# Altium PCB MGMEZZ02.PCBDOC (part 3 of 5)
Units mil, origin at the board's own origin, x right, y up, seen from the top; angles counter-clockwise.
Board outline 5705.83 x 3625.73 mil, 6 copper layers (Top Layer, Internal Plane 1, Mid-Layer 1, Mid-Layer 2, Internal Plane 2, Bottom Layer); 570 components, 354 nets, 2192 pads, 728 vias.
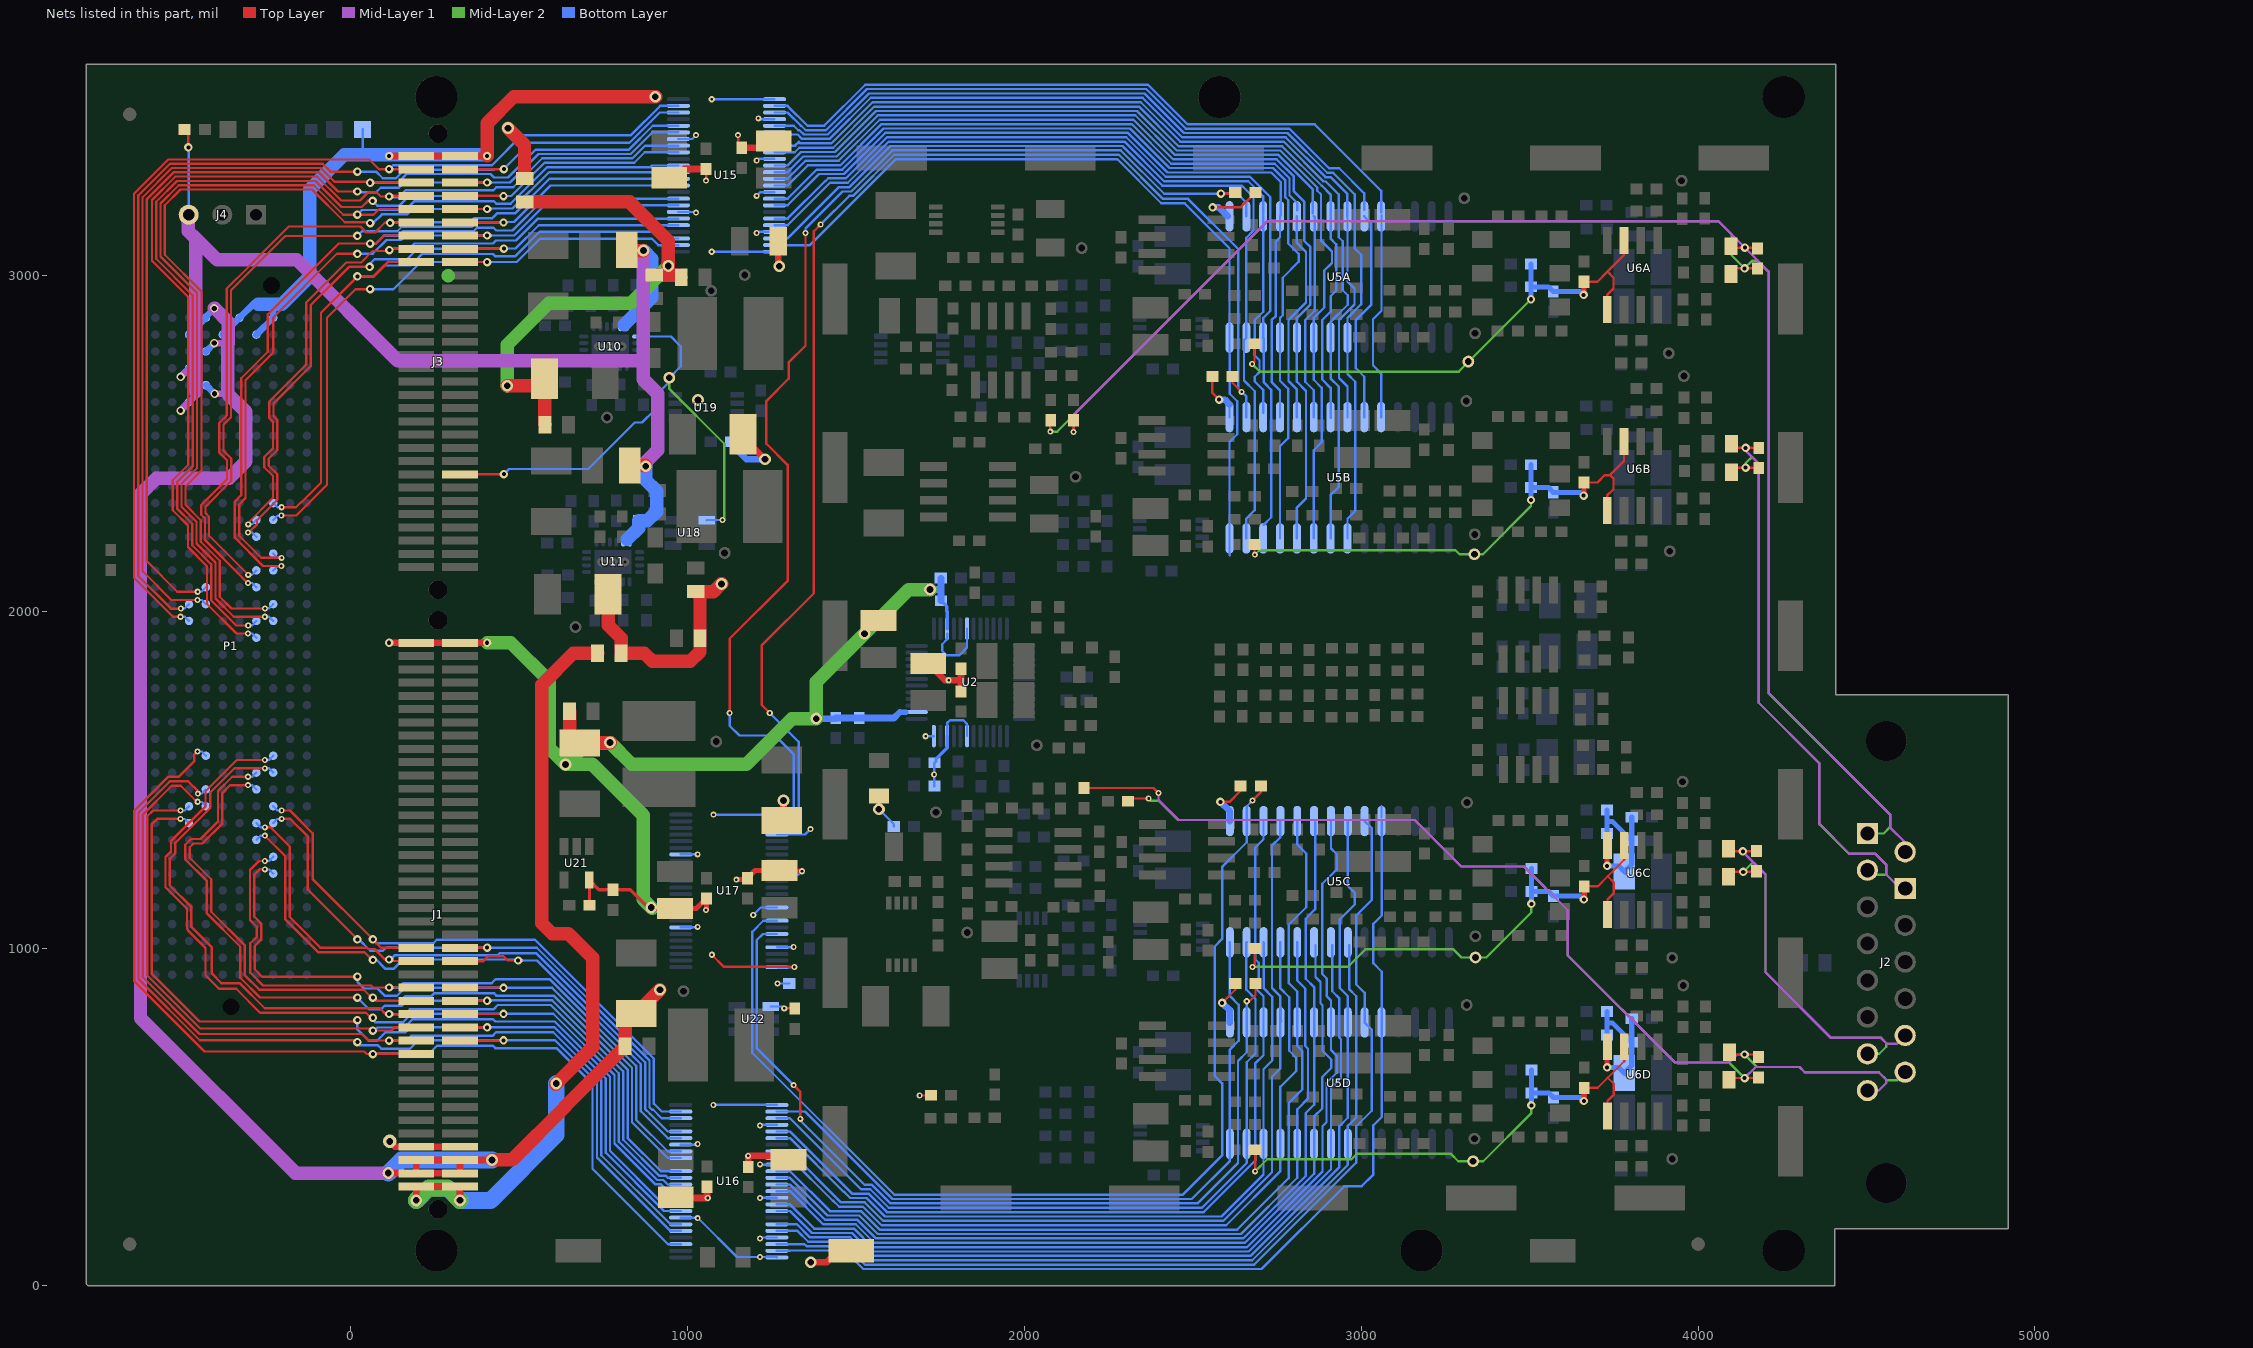
[diagram p7: the nets of this part, all layers, seen from the top]

## Via types
v1: diameter 25, hole 12, Top Layer to Bottom Layer, 292 vias
v2: diameter 18, hole 8, Top Layer to Bottom Layer, 225 vias
v3: diameter 25, hole 15, Top Layer to Bottom Layer, tented both sides, 91 vias
v4: diameter 18, hole 8, Top Layer to Bottom Layer, tented both sides, 61 vias
v5: diameter 35, hole 20, Top Layer to Bottom Layer, 58 vias
v6: diameter 40, hole 20, Top Layer to Bottom Layer, 1 vias

## Nets (pads, with @x,y where several pads share a name; then routed paths per layer and width w, separated by ;. In a path a pad name is that pad's centre, name@x,y a point inside that pad or via, vN(x,y) a via of type N, cw(c..) or ccw(c..) an arc to the next point about the centre after c; other vN are vias at no path point) (continued)
AMPBOTSUPC: C67C.2 C69C.1 C70C.1 R49C.1 R50C.1 U6C.4 | length 461.6
  Top Layer w15: v1(3730,1246) 3730,1306 U6C.4@3731,1307
  Bottom Layer w15: R50C.1@3729,1412 3730,1411 3730,1378 ; v1(3730,1246) 3763.88,1246 C67C.2@3780.88,1229 ; R49C.1@3730,1342 3730,1378 ; C67C.2@3784,1225.88 C67C.2@3780.88,1229 ; C70C.1@3803,1390.4 C69C.1@3803,1320.4 ; 3730,1378 3745.4,1378 C69C.1@3803,1320.4 ; C67C.2@3780.88,1229 3803,1251.12 C69C.1@3803,1320.4
AMPBOTSUPD: C67D.2 C69D.1 C70D.1 R49D.1 R50D.1 U6D.4 | length 461.6
  Top Layer w15: v1(3730,648) 3730,708 U6D.4@3731,709
  Bottom Layer w15: R50D.1@3729,814 3730,813 3730,780 ; v1(3730,648) 3763.88,648 C67D.2@3780.88,631 ; R49D.1@3730,744 3730,780 ; C67D.2@3784,627.88 C67D.2@3780.88,631 ; C70D.1@3803,792.4 C69D.1@3803,722.4 ; 3730,780 3745.4,780 C69D.1@3803,722.4 ; C67D.2@3780.88,631 3803,653.12 C69D.1@3803,722.4
BUCKSYNC: BuckSync.1 J3.50 U10.17 U18.4 | length 1557.6
  Top Layer w7: J3.50@324.55,2408.63 453.33,2408.63 453.63,2408.93 v1(454.63,2408.93)
  Mid-Layer 2 w7: BuckSync.1@946,2695 946,2662 1109,2499 v2@1109,2272.57
  Bottom Layer w7: v1(454.63,2408.93) 469.7,2424 705,2424 843,2562 865,2562 899.98,2596.98 899.98,2636.98 946,2683 BuckSync.1@946,2695 980,2729 980,2788 950.72,2817.28 U10.17@849.24,2817.28 ; U18.4@1057.14,2271.97 1057.74,2272.57 v2(1104,2272.57)
CMODEA: C75A.2 CModeA.1 R20A.1 R25A.2 R57A.2 R84A.2 U6A.3 U6A.5 | length 1620.9
  Top Layer w7: v2(2676,2736) 2683,2743 R57A.2@2683,2796 ; R84A.2@3661,2980 3701,2980 3731,3010 ; U6A.5@3730,2897 3730,2941 3749,2960 3749,2992 3731,3010 ; U6A.3@3780,3102 3780,3059 3731,3010
  Top Layer w15: v1(3660,2941) 3661,2942 R84A.2@3661,2980
  Mid-Layer 2 w7: v2(2676,2736) 2699,2713 3289,2713 v1(3504,2928)
  Bottom Layer w15: v1(3504,2928) C75A.2@3504,2965 3556,2965 R20A.1@3570,2951 3650,2951 v1(3660,2941) ; C75A.2@3504,2967 R25A.2@3504,3033
CMODEB: C75B.2 CModeB.1 R20B.1 R25B.2 R57B.2 R84B.2 U6B.3 U6B.5 | length 1566.6
  Top Layer w7: R57B.2@2683,2200 2683,2171 v2(2684,2170) ; R84B.2@3661,2384 3701,2384 3723,2406 3738,2406 3780,2448 U6B.3@3780,2506 ; U6B.5@3730,2301 3730,2345 3749,2364 3749,2396 3738.5,2406.5
  Top Layer w15: v1(3660,2345) 3661,2346 R84B.2@3661,2384
  Mid-Layer 2 w7: v2(2684,2170) 2697,2183 3280,2183 3292,2171 CModeB.1@3336,2171 3361,2171 3504,2314 v1@3504,2331
  Bottom Layer w15: v1(3504,2332) C75B.2@3504,2369 3556,2369 R20B.1@3570,2355 3650,2355 v1(3660,2345) ; C75B.2@3504,2371 R25B.2@3504,2437
CMODEC: C75C.2 CModeC.1 R20C.1 R25C.2 R57C.2 R84C.2 U6C.3 U6C.5 | length 1623.3
  Top Layer w7: v2(2677,946) 2684,953 R57C.2@2684,1001 ; R84C.2@3662,1185 3702,1185 3732,1215 ; U6C.5@3731,1102 3731,1146 3750,1165 3750,1197 3732,1215 ; U6C.3@3781,1307 3781,1264 3732,1215
  Top Layer w15: v1(3661,1146) 3662,1147 R84C.2@3662,1185
  Mid-Layer 2 w7: v2@2683,946 2960.1,946 3012.1,998 3274,998 3298,974 CModeC.1@3339,974 3371,974 3505,1108 v1(3505,1133)
  Bottom Layer w15: v1(3505,1133) C75C.2@3505,1170 3557,1170 R20C.1@3571,1156 3651,1156 v1(3661,1146) ; C75C.2@3505,1172 R25C.2@3505,1238
CMODED: C75D.2 CModeD.1 R20D.1 R25D.2 R57D.2 R84D.2 U6D.3 U6D.5 | length 1628.7
  Top Layer w7: R57D.2@2684,403 2685,402 v2(2685,339) ; R84D.2@3662,587 3702,587 3732,617 ; U6D.5@3731,504 3731,548 3750,567 3750,599 3732,617 ; U6D.3@3781,709 3781,666 3732,617
  Top Layer w15: v1(3661,548) 3662,549 R84D.2@3662,587
  Mid-Layer 2 w7: v2(2685,339) 2721,375 2970.81,375 2986.81,391 3266,391 3288,369 CModeD.1@3332,369 3362,369 3505,512 v1(3505,535)
  Bottom Layer w15: v1(3505,535) C75D.2@3505,572 3557,572 R20D.1@3571,558 3651,558 v1(3661,548) ; C75D.2@3505,574 R25D.2@3505,640
DACA_N: C112A.2 J2.9 L19A.2 R93AF.1 | length 4413.7
  Top Layer w7: v2(2146,2534) R93AF.1@2146,2569 ; L19A.2@4096,3088 L19A.2@4098,3086 ; L19A.2@4103,3081 v1(4139,3081) C112A.2@4174,3081
  Mid-Layer 1 w7: v2(2146,2534) 2146,2584 2722,3160 4060,3160 v1(4139,3081) 4210,3010 4210,1758.59 4570,1398.59 4570,1360 4614.75,1315.25 J2.9@4614.75,1287.53
DACA_P: C112A.1 J2.1 L18A.2 R22AF.1 | length 4476.5
  Top Layer w7: v2(2077,2535) 2077,2568 R22AF.1@2078,2569 ; L18A.2@4114,3020 v1(4138,3020) C112A.1@4175,3020
  Mid-Layer 2 w7: v2(2077,2535) 2097.43,2535 2722.43,3160 4060,3160 4100,3120 4100,3058 v1(4138,3020) 4160,3042 4176.78,3042 4209.39,3009.39 4209.39,1759.06 4570,1398.45 4570,1360.94 4551.09,1342.03 J2.1@4502.75,1342.03
DACB_N: C112B.2 J2.10 L19B.2 | length 1644
  Top Layer w7: L19B.2@4099,2499 4111,2487 v1(4141,2487) C112B.2@4180,2487
  Mid-Layer 1 w7: v1(4141,2487) 4141,2479 4180,2440 4180,1730 4360,1550 4360,1370.78 4448.78,1282 4525.22,1282 4558.75,1248.47 4558.75,1220 4600.22,1178.53 J2.10@4614.75,1178.53
DACB_P: C112B.1 J2.2 L18B.2 | length 1639.4
  Top Layer w7: L18B.2@4099,2414 4113,2428 v1(4141,2428) 4179,2428 C112B.1@4180,2427
  Mid-Layer 2 w7: v1(4141,2428) 4141,2441 4159.81,2459.81 4179.61,2440 4179.61,1733.8 4180,1733.41 4180,1730 4359.59,1550.41 4359.59,1377.04 4360,1376.63 4360,1370 4448,1282 4526.75,1282 4558.75,1250 4558.75,1220 4515.78,1220 J2.2@4502.75,1233.03
DACC_N: C112C.2 J2.14 L19C.2 | length 986.4
  Top Layer w7: L19C.2@4090,1297 4098,1289 v1(4133,1289) 4172,1289 C112C.2@4173,1290
  Mid-Layer 1 w7: v1(4133,1289) 4133,1287 4200,1220 4200,930 4394.78,735.22 4542.56,735.22 4560,717.78 4590,717.78 J2.14@4614.75,742.53
DACC_P: C112C.1 J2.7 L18C.2 | length 972
  Top Layer w7: L18C.2@4104,1228 v1(4134,1228) 4171,1228 C112C.1@4173,1230
  Mid-Layer 2 w7: v1(4134,1228) 4159,1253 4167.94,1253 4200,1220.94 4200,930 4394.78,735.22 4543.53,735.22 4558.75,720 4558.75,708.75 4538.03,688.03 J2.7@4502.75,688.03
DACD_N: C112D.2 J2.15 L19D.2 R93DF.1 | length 3010.3
  Top Layer w7: R93DF.1@2177,1477 2383,1477 v2(2398,1462) ; L19D.2@4093,693 4100,686 v1(4138,686) 4171,686 C112D.2@4179,678 C112D.2@4179.61,678.61
  Mid-Layer 1 w7: v2(2398,1462) 2398,1441.04 2457.02,1382.02 3158.98,1382.02 3297,1244 3483,1244 3613,1114 3613,980 3930.98,662.02 4092.02,662.02 4116,686 v1(4138,686)
  Mid-Layer 2 w7: v1(4138,686) 4175,649 4301,649 4316.47,633.53 4536.47,633.53 4560,610 4591.22,610 J2.15@4614.75,633.53
DACD_P: C112D.1 J2.8 L18D.2 R22DF.1 | length 2870.6
  Top Layer w7: R22DF.1@2308,1438 2316,1446 v2(2369,1446) ; L18D.2@4092,611 4097,616 v1(4138,616) 4177,616 C112D.1@4179,618
  Mid-Layer 1 w7: v1(4138,616) 4171,649 4301,649 4316.47,633.53 4536.47,633.53 4558.75,611.25 4558.75,601.53 4536.25,579.03 J2.8@4502.75,579.03
  Mid-Layer 2 w7: v2(2369,1446) 2375.5,1439.5 2398.5,1439.5 2456,1382 3159,1382 3297,1244 3483,1244 3613,1114 3613,980 3931,662 4092,662 v1(4138,616)
DACDATAAB0: U5A.7 U5B.7 U15.5 | length 2976.6
  Bottom Layer w7: U15.5@1258.17,3443.07 1315.47,3443.07 1328.54,3430 1332.39,3430 1345.39,3417 1416.23,3417 1538.23,3539 2356.23,3539 2473.73,3421.5 2781.11,3421.5 2898.87,3303.75 2916.54,3303.75 2980.86,3239.42 2980.86,3187.29 ; U5B.7@2959,2217.88 2959,2276.62 2982,2299.62 2982,2683 2959,2706 U5A.7@2959,2813.88 2959,2872.62 3000,2913.62 3000,3060 2980.31,3079.69 2980.31,3190
DACDATAAB1: U5A.8 U5B.8 U15.8 | length 2915.6
  Bottom Layer w7: U15.8@1258.17,3384.01 1319.32,3384.01 1330.46,3395.16 1334.62,3391 1427,3391 1549,3513 2345.46,3513 2462.96,3395.5 2770.35,3395.5 2888.1,3277.75 2894.74,3277.75 2933.07,3239.42 2933.07,3190.55 ; U5B.8@2909,2217.88 2909,2347 2933,2371 2933,2669 2909,2693 U5A.8@2909,2813.88 2909,2860.89 2960,2911.89 2960,2940 2945,2955 2945,3100 2933,3112 2933,3187.31
DACDATAAB2: U5A.9 U5B.9 U15.11 | length 2874.1
  Bottom Layer w7: U15.11@1258.17,3324.96 1297.03,3324.96 1337.08,3365 1437.77,3365 1559.77,3487 2334.69,3487 2452.19,3369.5 2759.58,3369.5 2869.49,3259.59 2869.49,3250.32 2880.31,3239.5 2880.31,3190.55 ; U5B.9@2859,2217.88 2859,2480 2883,2504 2883,2665 2859,2689 U5A.9@2859,2813.88 2859,2872.62 2890,2903.62 2890,3013 2913,3036 2913,3070 2880.31,3102.69 2880.31,3190
DACDATAAB3: U5A.10 U5B.10 U15.13 | length 2818
  Bottom Layer w7: U15.13@1258.17,3285.59 1297.03,3285.59 1350.45,3339 1448.54,3339 1570.54,3461 2323.92,3461 2441.42,3343.5 2748.81,3343.5 2799.91,3292.4 2799.91,3248.22 2830.31,3217.81 2830.31,3101.46 2849,3082.77 2849,2912.62 2809,2872.62 U5A.10@2809,2813.88 2809,2683 2836,2656 2836,2337 2809,2310 U5B.10@2809,2217.88
DACDATAAB4: U5A.11 U5B.11 U15.16 | length 2788.9
  Bottom Layer w7: U15.16@1258.17,3226.53 1297.03,3226.53 1383.5,3313 1459.31,3313 1581.31,3435 2313.15,3435 2430.65,3317.5 2738.04,3317.5 2773.91,3281.63 2773.91,3231.31 2783.18,3222.05 2783.18,3093.82 2814.11,3062.89 2814.11,3039.11 2767,2992 2767,2880.62 2759,2872.62 U5A.11@2759,2813.88 2759,2686.18 2783.18,2662 2783.18,2515.82 2759,2491.65 U5B.11@2759,2217.88
DACDATAAB5: U5A.12 U5B.12 U15.19 | length 2647.2
  Bottom Layer w7: U15.19@1258.17,3167.48 1297.03,3167.48 1407.98,3278.42 1409.28,3278.42 1417.86,3287 1470.08,3287 1592.08,3409 2302.38,3409 2419.88,3291.5 2669.73,3291.5 2730.31,3230.92 2730.31,2893.93 2709,2872.62 U5A.12@2709,2813.88 2711,2811.88 2711,2681 2733,2659 2733,2281 U5B.12@2710,2258
DACDATAAB6: U5A.13 U5B.13 U15.22 | length 2647.1
  Bottom Layer w7: U15.22@1258.17,3108.42 1297.03,3108.42 1449.61,3261 1480.85,3261 1602.85,3383 2291.61,3383 2409.11,3265.5 2645.5,3265.5 2680.31,3230.69 2680.31,3190 2680.31,3131.83 2659,3110.52 U5A.13@2659,2813.88 2652,2806.88 2652,2687 2684,2655 2684,2302 2659,2277 U5B.13@2659,2217.88
DACDATAAB7: U5A.14 U5B.14 U15.23 | length 2497.1
  Bottom Layer w7: U15.23@1258.17,3088.74 1363.74,3088.74 1619,3344 2275.46,3344 2406.46,3213 2475.62,3213 2609,3079.62 U5A.14@2609,2813.88 2609,2764.25 2609.39,2763.86 2609.39,2647.61 2632,2625 2632,2527 2609,2504 U5B.14@2609,2217.88 2609,2168.25 2609.39,2167.86
DACDATAAB8: U5A.17 U5B.17 U15.20 | length 2289.2
  Bottom Layer w7: U15.20@1258.17,3147.79 1297.03,3147.79 1423.24,3274 1475.46,3274 1597.46,3396 2297,3396 2414.5,3278.5 2664.35,3278.5 2708.77,3234.07 U5A.17@2708.77,3180.23 ; U5B.17@2708.97,2591.51 2708.97,2659.03 2684,2684 2684,2698 2698,2712 2698,2747 2684,2761 2684,2866 2709,2891 U5A.17@2709,3174.12
DACDATAAB9: U5A.18 U5B.18 U15.17 | length 2369
  Bottom Layer w7: U15.17@1258.17,3206.85 1297.03,3206.85 1390.19,3300 1464.69,3300 1586.69,3422 2307.77,3422 2425.27,3304.5 2732.65,3304.5 2760.91,3276.24 2760.91,3176.97 U5A.18@2761.45,3177.51 ; U5B.18@2759,2578.12 2759,2657 2734,2682 2734,2866 2746.5,2878.5 2746.5,3099.5 2759,3112 U5A.18@2759,3174.12
DACDATAAB10: U5A.19 U5B.19 U15.14 | length 2414.8
  Bottom Layer w7: U15.14@1258.17,3265.9 1297.03,3265.9 1357.13,3326 1453.92,3326 1575.92,3448 2318.54,3448 2436.04,3330.5 2743.42,3330.5 2786.91,3287.01 2786.91,3236.7 2809.79,3213.82 U5A.19@2809.79,3191.63 ; U5B.19@2809,2578.12 2809,2660.28 2784,2685.28 2784,2866 2836,2918 2836,3068.01 2809,3095.01 U5A.19@2809,3174.12
DACDATAAB11: U5A.20 U5B.20 U15.12 | length 2450.3
  Bottom Layer w7: U15.12@1258.17,3305.27 1297.03,3305.27 1343.76,3352 1443.15,3352 1565.15,3474 2329.31,3474 2446.81,3356.5 2754.19,3356.5 2856.49,3254.2 U5A.20@2856.49,3182.4 ; U5B.20@2859,2578.12 2859,2658 2834,2683 2834,2866 2862,2894 2862,3171.12 U5A.20@2859,3174.12
DACDATAAB12: U5A.21 U5B.21 U15.9 | length 2515.1
  Bottom Layer w7: U15.9@1258.17,3364.33 1318.02,3364.33 1331.69,3378 1432.38,3378 1554.38,3500 2340.08,3500 2457.58,3382.5 2764.96,3382.5 2882.72,3264.75 2883.31,3264.75 2909.17,3238.88 U5A.21@2909.17,3172.08 ; U5A.21@2909,3174.12 2909,3108 2926,3091 2926,2954 2909,2937 2909,2891 2884,2866 2884,2690 2909.17,2664.83 U5B.21@2909.17,2576.08
DACDATAAB13: U5A.22 U5B.22 U15.6 | length 2578.8
  Bottom Layer w7: U15.6@1258.17,3423.38 1297.03,3423.38 1303.42,3417 1327,3417 1340,3404 1421.61,3404 1543.61,3526 2350.85,3526 2468.35,3408.5 2775.73,3408.5 2893.49,3290.75 2908.9,3290.75 2958.05,3241.6 U5A.22@2958.05,3173.17 ; U5B.22@2959,2578.12 2959,2669 2934,2694 2934,2866 2980,2912 2980,2960 2959,2981 U5A.22@2959,3174.12
DACDATAAB14: U5A.23 U5B.23 U15.3 | length 2633.7
  Bottom Layer w7: U15.3@1258.17,3482.44 1297.03,3482.44 1336.47,3443 1337.77,3443 1350.77,3430 1410.84,3430 1532.84,3552 2361.62,3552 2479.11,3434.5 2786.5,3434.5 2904.25,3316.75 2934.49,3316.75 3008.55,3242.68 U5A.23@3008.55,3193.81 ; U5B.23@3009,2578.12 3009,2698 2984,2723 2984,2866 3030,2912 3030,3153.12 U5A.23@3009,3174.12
DACDATAAB15: U5A.24 U5B.24 U15.2 | length 2721.9
  Bottom Layer w7: U15.2@1258.17,3502.12 1297.03,3502.12 1356.16,3443 1405.46,3443 1527.46,3565 2367,3565 2484.5,3447.5 2861.5,3447.5 3059.06,3249.94 U5A.24@3059.06,3185.66 ; U5B.24@3059,2578.12 3059,2708 3035,2732 3035,2868.88 3060,2893.88 U5A.24@3060,3177 ; U5B.24@3059.06,2589.66 U5B.24@3059.06,2621.7
DACDATACD0: U5C.7 U5D.7 U16.20 | length 2518.9
  Bottom Layer w7: U16.20@1265.18,162.25 1326.32,162.25 1358.57,130 1477.61,130 1532.61,75 2676.62,75 2960,358.38 U5D.7@2960,420.88 2960,474 2985,499 2985,859 2964,880 U5C.7@2964,1009.88
DACDATACD1: U5C.8 U5D.8 U16.17 | length 2483.7
  Bottom Layer w7: U16.17@1265.18,221.3 1304.03,221.3 1369.33,156 1488.38,156 1543.38,101 2665.85,101 2910,345.15 U5D.8@2910,420.88 2910,586 2940,616 2940,731.31 2935,736.31 2935,852.63 2914,873.63 U5C.8@2914,1009.88
DACDATACD2: U5C.9 U5D.9 U16.14 | length 2461.8
  Bottom Layer w7: U16.14@1265.18,280.36 1304.03,280.36 1402.39,182 1499.15,182 1554.15,127 2655.08,127 2860,331.92 U5D.9@2860,420.88 2860,502 2884,526 2884,619 2911,646 2911,671 2885,697 2885,832.2 2879,838.2 2879,901.38 2864,916.38 U5C.9@2864,1009.88
DACDATACD3: U5C.10 U5D.10 U16.12 | length 2408.4
  Bottom Layer w7: U16.12@1265.18,319.73 1304.03,319.73 1415.76,208 1509.92,208 1564.92,153 2643,153 2810,320 U5D.10@2810,420.88 2810,523 2842,555 2842,703.23 2834,711.23 2834,882 2810,906 U5C.10@2810,1018.88
DACDATACD4: U5C.11 U5D.11 U16.9 | length 2362.1
  Bottom Layer w7: U16.9@1265.18,378.78 1304.03,378.78 1430.82,252 1432.12,252 1450.12,234 1520.69,234 1575.69,179 2599,179 2760,340 U5D.11@2760,420.88 2760,590 2807,637 2807,675.88 2786,696.88 2786,855.91 2760,881.91 U5C.11@2760,1018.88
DACDATACD5: U5C.12 U5D.12 U16.6 | length 2303.5
  Bottom Layer w7: U16.6@1265.18,437.84 1304.03,437.84 1463.87,278 1465.17,278 1483.17,260 1531.46,260 1586.46,205 2585,205 2710,330 U5D.12@2710,420.88 2710,642 2736,668 2736,857 2711,882 2711,1017.88 U5C.12@2710,1018.88
DACDATACD6: U5C.13 U5D.13 U16.3 | length 2237.9
  Bottom Layer w7: U16.3@1265.18,496.89 1304.03,496.89 1514.93,286 1542.23,286 1597.23,231 2527.31,231 2660,363.69 U5D.13@2660,420.88 2660,663 2686,689 2686,851 2658.5,878.5 2658.5,1017.38 U5C.13@2660,1018.88
DACDATACD7: U5C.14 U5D.14 U16.2 | length 2169.6
  Bottom Layer w7: U16.2@1265.18,516.58 1348.42,516.58 1608,257 2497,257 2610,370 U5D.14@2610,420.88 2610,701 2636,727 2636,833.39 2610,859.39 U5C.14@2610,1018.88
DACDATACD8: U5C.17 U5D.17 U16.5 | length 2630.7
  Bottom Layer w7: U16.5@1265.18,457.52 1304.03,457.52 1488.56,273 1536.85,273 1591.85,218 2532.69,218 2685,370.31 2685,659 2710,684 U5D.17@2710,781.12 2710,859 2685,884 2685,900 2695.5,910.5 2695.5,958.5 2685,969 2685,1300 2710,1325 U5C.17@2710,1379.12
DACDATACD9: U5C.18 U5D.18 U16.8 | length 2731.3
  Bottom Layer w7: U16.8@1265.18,398.47 1304.03,398.47 1455.5,247 1526.08,247 1581.08,192 2590.38,192 2735,336.62 2735,620 2760,645 U5D.18@2760,781.12 2760,858 2735,883 2735,1306 2760,1331 U5C.18@2760,1379.12 ; U5D.18@2761.91,825.71 2761.91,783.97 U5D.18@2762.45,784.51
DACDATACD10: U5C.19 U5D.19 U16.11 | length 2781
  Bottom Layer w7: U16.11@1265.18,339.41 1304.03,339.41 1422.44,221 1515.31,221 1570.31,166 2632,166 2785,319 2785,542 2825,582 2825,696.38 2810,711.38 U5D.19@2810,781.12 2810,873 2785,898 2785,1071 2837,1123 2837,1282.38 2810,1309.38 U5C.19@2810,1379.12
DACDATACD11: U5C.20 U5D.20 U16.13 | length 2796
  Bottom Layer w7: U16.13@1265.18,300.04 1304.03,300.04 1409.07,195 1504.54,195 1559.54,140 2649.69,140 2835,325.31 2835,512 2860,537 U5D.20@2860,781.12 2860,886 2835,911 2835,1089 2863,1117 U5C.20@2863,1376.12
DACDATACD12: U5C.21 U5D.21 U16.16 | length 2866.1
  Bottom Layer w7: U16.16@1265.18,240.99 1304.03,240.99 1376.02,169 1493.77,169 1548.77,114 2660.46,114 2885,338.54 2885,473 2897,485 2897,602 2927,632 2927,681.85 2910,698.85 U5D.21@2910,781.12 2910,846 2898,858 2898,911 2884,925 2884,1192.62 2927,1235.62 2927,1280.38 2910,1297.38 U5C.21@2910,1379.12
DACDATACD13: U5C.22 U5D.22 U16.19 | length 2893
  Bottom Layer w7: U16.19@1265.18,181.93 1325.02,181.93 1363.95,143 1483,143 1538,88 2671.23,88 2935,351.77 2935,473 2960,498 U5D.22@2960,781.12 2960,859.25 2936,883.25 2936,1087 2981,1132 2981,1165 2960,1186 U5C.22@2960,1379.12
DACDATACD14: U5C.23 U5D.23 U16.22 | length 2950.5
  Bottom Layer w7: U16.22@1265.18,122.88 1347.3,122.88 1353.18,117 1472.23,117 1527.23,62 2682,62 2985,365 2985,473 3031,519 3031,760.12 U5D.23@3010,781.12 3010,869 2985,894 2985,1099 3031,1145 3031,1358.12 U5C.23@3010,1379.12
DACDATACD15: U5C.24 U5D.24 U16.23 | length 3057.5
  Bottom Layer w7: U16.23@1265.18,103.19 1304.03,103.19 1304.84,104 1466.84,104 1521.84,49 2704,49 2950,295 3001,295 3036,330 3036,475.88 3061,500.88 3061,931.88 3036,956.88 3036,1073.88 3061,1098.88 U5C.24@3061,1382 ; U5D.24@3060.06,792.66 U5D.24@3060.06,824.7 ; U5C.24@3060.06,1390.66 U5C.24@3060.06,1422.7
DGND: C9.1 C19.1 C34.1 C42.1 C43.1 C93.1 C94.2 C96.2 C99.2 C108.2 C116.2 C117.2 C120.2 C121.2 C124.2 C125.2 C130.2 J7.1 R81.2 R86.2 R107.1 R108A.1 R108B.1 R108C.1 R108D.1 U2.19 U2.22 U2.24 U5A.15 U5B.15 U5C.15 U5D.15 U15.4 U15.10 U15.15 U15.21 U16.4 U16.10 U16.15 U16.21 U17.4 U17.10 U17.15 U17.21 U19.4 U22.1 | length 3176.8
  Top Layer w7: v2(1150,3415) 1150,3388.35 C117.2@1160.64,3377.71 ; v2(1287,823) 1317.49,823 C130.2@1318.49,822 ; v2(1689,564.22) 1721.27,564.22 C94.2@1722.27,565.22 ; R108B.1@2558,2699 2558,2650 v1(2578,2630) ; v1(2559,3201) 2642,3201 R108A.1@2686,3245 ; v1(2582,1436) 2609,1436 2642,1469 R108C.1@2642,1483 ; v1(2587,839) 2626,878 R108D.1@2626,898
  Top Layer w15: v2(1145,1205) 1173.66,1205 C125.2@1177.81,1209.15 1200.55,1231.89 C124.2@1272.81,1231.89 1274.7,1230 v2(1340,1230)
  Top Layer w20: C117.2@1160.64,3377.71 1235.41,3377.71 C116.2@1255.64,3397.95 ; C96.2@1164.64,2526.85 1164.64,2518.36 v5(1230,2453) ; C99.2@1269.17,3100 1269.17,3028.83 v5(1272,3026) ; C108.2@1280.12,1380.4 1285,1385.28 v5(1285,1440) ; C120.2@1300.06,373.21 1288.26,385 v2(1180,385) C121.2@1180,352.42 ; v5@1367,69 1413,69 J7.1@1446,102 ; v5(1568,1414) 1568.38,1414.38 R81.2@1568.38,1453.83 ; C34.1@1714.35,1846.85 1764.2,1797 v2(1775,1797) 1812,1797 ; C19.1@1812,1764 1812,1797 ; C9.1@1812,1831 1812,1797 ; C121.2@1179.96,352.38 C121.2@1180,352.42
  Bottom Layer w7: v2(1195,1100) 1217.44,1122.44 U17.15@1265.53,1122.44 ; v2(1205,3125) 1208.11,3128.11 U15.21@1258.17,3128.11 ; v2(1205,3235) 1216.22,3246.22 U15.15@1258.17,3246.22 ; v2(1205,3340) 1209.64,3344.64 U15.10@1258.17,3344.64 ; v2(1210,3465) 1212.25,3462.75 U15.4@1258.17,3462.75 ; v2(1215,260) 1215.67,260.67 U16.15@1265.18,260.67 ; v2(1215,360) 1215.9,359.1 U16.10@1265.18,359.1 ; v2(1215,475) 1217.21,477.21 U16.4@1265.18,477.21 ; v2@1217.56,142.56 U16.21@1265.18,142.56 ; U22.1@1247,828.5 1281.5,828.5 v2(1287,823) ; U17.21@1265.53,1004.33 1314.33,1004.33 v2(1315,1005) ; U17.10@1265.53,1220.86 1330.86,1220.86 v2(1340,1230) ; U17.4@1265.53,1338.97 1348.97,1338.97 v2(1365,1355) ; v2(1267,896.87) C93.1@1302,896.87 ; v5(1568,1414) 1612,1370 R107.1@1612,1363 ; v2(1707,1630.77) 1730.76,1630.77 U2.24@1731.32,1631.33 ; C42.1@1732.59,1482.78 1732.59,1550.78 C43.1@1733.59,1551.78 C43.1@1737.69,1555.88 ; U2.22@1770.69,1631.33 1770.69,1669.69 1779,1678 1819,1678 1829.74,1667.26 U2.19@1829.74,1631.33 ; U5A.15@2603.88,3174.12 U5A.15@2609,3174.12 ; U5B.15@2609,2578.12 U5B.15@2609,2616
  Bottom Layer w10: C43.1@1737.69,1555.88 1737.69,1563.61 1770.69,1596.61 U2.22@1770.69,1631.33
  Bottom Layer w20: U19.4@1148,2569 1148,2480 1175,2453 v5(1230,2453) ; v1(2559,3201) 2577,3201 U5A.15@2603.88,3174.12 ; v1(2578,2630) 2595,2630 U5B.15@2609,2616 ; v1(2582,1436) 2610,1408 U5C.15@2610,1379.12 ; v1(2587,839) 2610,816 U5D.15@2610,781.12
  other v2: 1215,140 1732,1517
  other v5: 1366,69 1031,2629
FASTDACCLKA: R108A.2 U5A.16 U17.2 | length 3638.7
  Top Layer w7: v2(1125,1700) 1125,1920 1297,2092 1297,2436.23 1234,2499.23 1234,2625.77 1300,2691.77 1300,2740 1350,2790 v2(1350,3125) ; v1(2583,3241.6) 2622.6,3241.6 R108A.2@2626,3245
  Bottom Layer w7: v2(1125,1700) 1125,1662 1154,1633 1260,1633 1315,1578 1315,1397.17 1300.46,1382.62 1269.81,1382.62 U17.2@1265.53,1378.34 ; v2(1350,3125) 1350,3138.38 1459.62,3248 1486.23,3248 1608.23,3370 2286.23,3370 2415.23,3241 2632.38,3241 2659,3214.38 U5A.16@2659,3174.12
FASTDACCLKB: R108B.2 U5B.16 U17.3 | length 3963.3
  Top Layer w7: v2(1244,1700) 1220,1724 1220,1900 1375,2055 1375,3130 v2(1395,3150) ; R108B.2@2618,2699 2618,2680 v2(2645,2653)
  Bottom Layer w7: v2(1244,1700) 1330,1614 1330,1390 1298.66,1358.66 U17.3@1265.53,1358.66 ; v2(1395,3150) 1480,3235 1491.62,3235 1613.62,3357 2280.84,3357 2411.84,3226 2486.12,3226 2635,3077.12 2635,2663 v2(2645,2653) 2659,2639 U5B.16@2659,2578.12
FASTDACCLKC: R108C.2 U5C.16 U17.17 | length 3226.3
  Top Layer w7: v2(2677,1440) 2702,1465 R108C.2@2702,1483
  Bottom Layer w7: U17.17@1265.53,1083.07 1225,1083.07 1192,1050.07 1192,691.38 1613.38,270 2471,270 2587,386 2587,600.25 2565,622.25 2565,1006.75 2587,1028.75 2587,1243 2660,1316 U5C.16@2660,1379.12 2660,1423 v2(2677,1440)
FASTDACCLKD: R108D.2 U5D.16 U17.19 | length 2654.5
  Top Layer w7: v2(1315,595) 1335,575 v2(1335,495) ; v2(2660,844) 2668,844 2686,862 R108D.2@2686,886
  Bottom Layer w7: U17.19@1265.53,1043.7 1223.7,1043.7 1205,1025 1205,705 v2(1315,595) ; v2@1332.5,492.5 1526,299 1547.62,299 1602.62,244 2514,244 2634,364 2634,666.85 2660,692.85 U5D.16@2660,781.12 v2(2660,844)
FMC12V: C49.1 C51.1 J4.3 P1.C35 P1.C37 R36.2 R37.1 R102.2 U10.15 U10.16 U11.15 U11.16 | length 3808.9
  Top Layer w7: R102.2@-493,3432 -481.99,3420.99 v1(-481.99,3379)
  Top Layer w20: C51.1@819.6,3074.33 C51.1@821.21,3072.72 ; C49.1@828.18,2434.64 C49.1@829.79,2433.03
  Top Layer w40: C51.1@821.21,3072.72 v5(869.13,3072.72) ; C49.1@828.18,2434.64 v5@873.96,2434.64
  Mid-Layer 1 w20: v3(-504.98,2597.52) -460,2642.49 -460,2654 ; v3(-504.98,2697.52) -470.49,2732 -460,2732
  Mid-Layer 1 w40: J4.3@-481,3179 -481.99,3178.01 -481.99,3130.14 -460,3108.15 ; -460,2654 -460,2732 -460,3108.15 ; v5(869.13,3072.72) 869.13,2746 ; v5(876.1,2432.49) 876.1,2445.1 911,2480 911,2648.07 869.13,2689.94 869.13,2746 ; -460,3108.15 -396.85,3045 -160,3045 139,2746 869.13,2746
  Bottom Layer w7: J4.3@-481,3179 v1@-481,3380
  Bottom Layer w20: v3(-504.98,2597.52) -504.98,2597.99 P1.C35@-479.98,2622.99 ; v3(-504.98,2697.52) -504.98,2697.99 P1.C37@-479.98,2722.99
  Bottom Layer w40: 812.52,2852.52 846.53,2886.53 R37.1@846.53,2909.87 871.03,2909.87 893.59,2932.43 893.59,3048.26 v5(869.13,3072.72) ; 821.14,2215.15 854.64,2248.64 R36.2@854.64,2270.26 880.77,2270.26 906.14,2295.63 906.14,2295.74 908.3,2297.9 908.3,2358.7 876.1,2390.9 v5(876.1,2432.49)
MB2V5P: C32.2 C38.2 C39.2 C40.2 C46.2 C107.1 C114.1 C115.1 C118.1 C119.1 C122.1 C123.1 C127.1 DP2.1 J1.1 J1.2 J3.1 J3.2 P1.E39 P1.F40 P1.G39 P1.H40 pad.1 R46.1 R101.2 U2.26 U2.39 U2.42 U15.1 U15.24 U15.31 U15.42 U16.1 U16.24 U16.31 U16.42 U17.1 U17.24 U17.31 U17.42 U21.5 | length 8417.8
  Top Layer w7: v2(1055,3280) C115.1@1055,3315 ; v2@1057.49,262.51 v2(1060,260) ; v2(1072,982) 1108,946 v2(1317,946)
  Top Layer w10: U21.5@708.5,1203.53 U21.5@709,1203.03 ; R101.2@709,1129 U21.5@709,1203.03 ; v5@885.85,1119.15 830,1175 C127.1@779.09,1175 737.03,1175 U21.5@709,1203.03
  Top Layer w15: v5@885.85,1119.15 C122.1@962.81,1119.15 1026.21,1119.15 C123.1@1056.42,1149.36 1056.42,1116.42 v2(1055,1115)
  Top Layer w20: v1(114.33,1908.37) J1.1@194.63,1908.37 ; pad.1@114.33,3353.43 194.05,3353.43 J3.1@194.45,3353.03 J3.2@324.37,3353.03 ; J1.1@194.52,1907.97 J1.2@324.43,1907.97 ; J1.2@324.55,1908.37 v1(404.85,1908.37) ; J3.2@324.55,3353.43 pad.1@404.85,3353.43 ; C107.1@650,1640.52 C107.1@679.52,1611 ; C107.1@680.12,1610.4 C107.1@681.72,1612 ; C114.1@945.87,3288.61 963.61,3288.61 990,3315 C115.1@1055,3315 ; C118.1@964.96,262.32 967.29,260 v2(1060,260) ; v2@1057.49,262.51 C119.1@1057.49,293.4
  Top Layer w40: pad.1@404.85,3353.43 404.85,3449.85 484,3529 v5@905,3529 ; C107.1@650,1640.52 R46.1@650,1705 ; C107.1@679.52,1611 C107.1@680.12,1610.4 ; C107.1@681.72,1612 v5(770,1612)
  Mid-Layer 2 w40: v1(404.85,1908.37) 475.63,1908.37 590,1794 590,1595 v5(638,1547) ; v5@895,1119.44 868,1146.44 868,1396.83 717.83,1547 v5(638,1547) ; v5(1720,2066.28) 1656.28,2066.28 1382,1792 v5(1382,1683) 1310,1683 1175,1548 834,1548 v5(770,1612) 703,1612 v5(638,1547)
  Bottom Layer w7: DP2.1@35.4,3432.37 35.4,3359.6 38,3357 ; U15.31@972.73,3187.16 1022.84,3187.16 v2(1025,3185) ; U15.42@972.73,3403.7 1013.7,3403.7 v2(1025,3415) ; U16.31@979.74,201.62 1028.38,201.62 v2(1030,200) 1032,200 1147,85 v2(1215,85) 1263.68,85 U16.24@1265.18,83.51 ; U16.42@979.74,418.15 1028.15,418.15 v2(1030,420) ; U17.31@980.1,1063.38 1028.38,1063.38 v2(1030,1065) ; U17.42@980.1,1279.92 1029.92,1279.92 v2(1030,1280) ; v2@1070,3520 v2(1071.81,3521.81) U15.1@1258.17,3521.81 ; v2(1071.81,3069.05) U15.24@1258.17,3069.05 ; v2(1076.65,536.26) U16.1@1265.18,536.26 ; v2(1077,1398.03) U17.1@1265.53,1398.03 ; U17.24@1267.53,945.33 v2@1316.33,945.33 ; U2.39@1770.69,1935 1770.69,1918.69 1756,1904 1756,1884 1769,1871 1807,1871 1829.74,1893.74 U2.42@1829.74,1950.23
  Bottom Layer w10: C46.2@1751.59,2100.78 C46.2@1752.59,2099.78 ; C40.2@1752.59,2032.78 1769.37,2015.99 1769.37,2001.87 1770.69,2000.55 U2.39@1770.69,1950.23
  Bottom Layer w15: 1630,1702 U2.26@1648,1702
  Bottom Layer w20: P1.E39@-379.98,2822.99 P1.F40@-329.98,2872.99 -285.96,2917 -249.98,2917 -229.98,2897 ; P1.G39@-279.98,2822.99 P1.H40@-229.98,2872.99 ; v5(1382,1683) 1438,1683 C39.2@1440,1685 C38.2@1510,1685 1613,1685 1630,1702 ; v5(1720,2066.28) 1747.45,2066.28 ; C40.2@1752.59,2032.78 C46.2@1752.59,2099.78 ; P1.H40@-229.98,2872.99 -229.98,2897 ; P1.H40@-229.98,2872.99 -229.98,2897.02
  Bottom Layer w40: -274,2913 -204,2913 -121,2996 -121,3255 -19,3357 38,3357 pad.1@404.85,3357
  other v5: 892,1122.44 1525,1935 904,3529
MB3V7P: C104.1 Ip3V7p.1 J1.79 J1.80 J1.81 J1.82 P1.C39 P1.D36 P1.D38 P1.D40 R45.1 | length 5270.6
  Top Layer w7: J1.80@324.55,373.07 324.62,373 v5@416.63,373 ; v5@416.7,373.07 v5@416.63,373 ; v5(419.63,373) v5@416.63,373
  Top Layer w20: v5(111.63,334) 194.33,334 J1.81@194.63,333.7 ; v5@416.7,373.07 J1.80@324.55,373.07 ; J1.81@194.63,333.7 324.55,333.7 J1.80@324.55,373.07 ; J1.81@194.63,333.7 194.63,373.07 J1.80@324.55,373.07
  Top Layer w40: v5(419.63,373) 478.87,373 636.87,531 636.87,531.87 R45.1@815,710 815,774.72 C104.1@847.88,807.6 847.88,807.88 Ip3V7p.1@918,878
  Mid-Layer 1 w20: v3(-405,2797.52) -364.52,2797.52 -364,2797 ; v3(-404,2647.52) -365.03,2647.52
  Mid-Layer 1 w40: v3(-405,2901) -404.01,2901 -364,2860.99 -364,2797 ; -365.03,2647.52 -364.52,2647 ; -364.52,2797.52 -364.52,2647 ; v5(111.63,334) -164,334 -624,794 -624,2350 -577,2397 -361,2397 -311,2447 -311,2593.48 -364.52,2647
  Bottom Layer w20: P1.C39@-479.98,2822.99 P1.D40@-429.98,2872.99 -429.98,2876.02 v3(-405,2901) ; P1.D36@-429.98,2672.99 -429.47,2672.99 v3(-404,2647.52) ; P1.D38@-429.98,2772.99 -429.53,2772.99 v3(-405,2797.52)
  Bottom Layer w50: v5(111.63,334) 150.63,373 v5(419.63,373)
MB5V5N: J1.83 J1.84 R79.1 | length 2577.7
  Top Layer w20: v5(194.63,252.92) 194.63,294.33 324.55,294.33 v5(324.55,252.92)
  Top Layer w40: v5@609,598 718,707 718,973 646.59,1044.41 598.59,1044.41 567,1076 567,1783 661,1877 R79.1@733,1877
  Mid-Layer 2 w50: v5(194.63,252.92) 230.72,289 288.47,289 v5(324.55,252.92)
  Bottom Layer w50: v5(194.63,252.92) 231.72,290 287.47,290 v5(324.55,252.92) 415.72,252.92 610,447.2 v5(610,600)
MB5V5NINT: C100.2 In5V5p.1 R44.1 R79.2 R109.1 | length 717
  Top Layer w40: C100.2@764.3,2052.12 764.3,1960.45 803,1921.75 R79.2@803,1877 871.87,1877 895.87,1853 1008,1853 1037,1882 R109.1@1037,1921 1037,2047 R44.1@1024,2060 1076.88,2060 1099.88,2083 In5V5p.1@1101,2083
MB5V5P: J1.77 J1.78 R78.1 | length 384.5
  Top Layer w20: v6(115.7,427.82) 131.08,412.43 J1.78@324.55,412.43
  Top Layer w40: v5(467,3436) 516,3387 R78.1@516,3287
MB5V5PINT: C97.1 Ip5V5p.1 L17.1 R43.1 R58.2 R78.2 | length 1613
  Top Layer w40: v5(465,2671) 554.9,2671 C97.1@575.71,2691.81 575.71,2557.29 L17.1@577,2556 ; R78.2@516,3217 827.75,3217 943,3101.75 Ip5V5p.1@943,3027 943,3000.97 942,2999.97 ; R58.2@900.79,2999.97 942,2999.97 ; R43.1@981.29,2992.76 974.07,2999.97 942,2999.97
  Mid-Layer 2 w40: v5(465,2671) 465,2793 588,2916 832,2916 Ip5V5p.1@943,3027
MBDACDATAAB0: J3.5 P1.D23 U15.44 | length 3200
  Top Layer w6.5: v4(-454.98,2035.49) -532.52,2035.49 -617.75,2120.72 -617.75,3231.05 -531.3,3317.5 -88.7,3317.5 -48.2,3277 54.48,3277 v1(57.55,3273.93)
  Top Layer w7: v1(57.55,3273.93) v1@58.32,3274.7 ; v1@57.55,3274.7 v1@58.32,3274.7 ; J3.5@194.63,3274.7 v1@58.32,3274.7
  Bottom Layer w6.5: v4(-454.98,2035.49) -442.48,2035.49 P1.D23@-429.98,2022.99
  Bottom Layer w7: v1(57.55,3273.93) 139.55,3273.93 165.62,3300 415,3300 425.63,3289.37 466.63,3289.37 549.63,3372.37 825.75,3372.37 896.45,3443.07 U15.44@972.73,3443.07
MBDACDATAAB1: J3.7 P1.G21 U15.41 | length 3276.3
  Top Layer w6.5: v4(-304.98,1935.49) -338.77,1935.49 -427,2023.71 -427,2136.1 -483.23,2192.32 -483.23,2256.53 -528,2301.3 -528,2391.06 -481.99,2437.07 -481.99,2934.72 -590,3042.73 -590,3222.74 -520.74,3292 -99.26,3292 -28.26,3221 28,3221
  Top Layer w7: 28,3221 53,3246 76,3246 89,3233 v1(114,3233) 115.93,3234.93 J3.7@194.45,3234.93
  Bottom Layer w6.5: v4(-304.98,1935.49) -292.48,1935.49 P1.G21@-279.98,1922.99
  Bottom Layer w7: v1(114,3233) 117,3230 141.27,3230 162.63,3251.37 423.63,3251.37 432.63,3260.37 482.63,3260.37 568.63,3346.37 836.52,3346.37 874.17,3384.01 U15.41@972.73,3384.01
MBDACDATAAB2: J3.9 P1.H22 U15.38 | length 3321.9
  Top Layer w6.5: v4(-254.98,1985.49) -347.17,1985.49 -401.5,2039.82 -401.5,2146.66 -457.73,2202.88 -457.73,2267.09 -502.5,2311.86 -502.5,2380.5 -456.49,2426.51 -456.49,2946.81 -564.5,3054.82 -564.5,3212.18 -510.18,3266.5 -109.82,3266.5 -22.32,3179 v1(20,3179)
  Top Layer w7: v1(20,3179) 67.62,3179 84.58,3195.97 J3.9@194.63,3195.97
  Bottom Layer w6.5: v4(-254.98,1985.49) -242.48,1985.49 P1.H22@-229.98,1972.99
  Bottom Layer w7: v1(20,3179) 34,3193 162.62,3193 188.98,3219.37 424.63,3219.37 432.63,3211.37 474.63,3211.37 583.63,3320.37 890.3,3320.37 894.89,3324.96 U15.38@972.73,3324.96
MBDACDATAAB3: J3.11 P1.G24 U15.36 | length 2580.4
  Top Layer w6.5: v4(-304.98,2085.49) -305.78,2085.49 -322.46,2102.16 -322.46,2102.97 -432.73,2213.24 -432.73,2277.44 -443.5,2288.22 -443.5,2317.5 -367,2394 -367,2450 -390,2473 -390,2561 -368,2583 -368,2959.68 -304.5,3023.18 -304.5,3023.5 -184,3144 29,3144 47,3126 72,3126 101,3155 v1(117,3155)
  Top Layer w7: v1(117,3155) 194.44,3156.6 J3.11@194.63,3156.6
  Bottom Layer w6.5: v4(-304.98,2085.49) -292.48,2085.49 P1.G24@-279.98,2072.99
  Bottom Layer w7: v1@117,3156.37 354.37,3156.37 367,3169 420.47,3169 423.83,3172.37 434.63,3183 487.63,3183 590.22,3285.59 U15.36@972.73,3285.59
MBDACDATAAB4: J3.13 P1.H25 U15.33 | length 2422.5
  Top Layer w7: v4(-205.74,2136.25) -260.18,2136.25 -343.75,2219.82 -343.75,2327.63 -324.75,2346.63 -324.75,2693.28 -246,2772.03 -246,2883 -35.63,3093.37 v1(57.55,3093.37) 75,3093.37 98.87,3117.23 J3.13@194.63,3117.23
  Bottom Layer w6.5: P1.H25@-229.98,2122.99 -217.48,2135.49 -204.98,2135.49 v4(-205.74,2136.25)
  Bottom Layer w7: v1(57.55,3093.37) 75,3093.37 98.63,3117 143.62,3117 156.98,3130.37 365.14,3130.37 375.14,3140.37 423.63,3140.37 432,3132 480.27,3132 574.8,3226.53 U15.33@972.73,3226.53
MBDACDATAAB5: J3.15 P1.G28 U15.30 | length 2077.7
  Top Layer w6.5: v4(-304.21,2259.72) -304.21,2264.79 -231,2338 -231,2404 -256.51,2429.51 -256.51,2459.52 -231,2485.03 -231,2565 -241.75,2575.75 -241.75,2624.28 -131.75,2734.28 -131.75,2918.25 -12.75,3037.25 31.25,3037.25 65.62,3071.62 112.62,3071.62 v1(115,3074)
  Top Layer w7: v1@115,3077.87 J3.15@194.63,3077.87
  Bottom Layer w6.5: v4(-304.21,2259.72) -304.98,2260.49 -292.48,2260.49 P1.G28@-279.98,2272.99
  Bottom Layer w7: v1@114.33,3077.87 174.13,3077.87 189.63,3093.37 422.63,3093.37 431.63,3102.37 490.63,3102.37 555.74,3167.48 U15.30@972.73,3167.48
MBDACDATAAB6: J3.17 P1.H29 U15.27 | length 2048.7
  Top Layer w7: v4(-204.98,2310.49) -162.51,2310.49 -147.48,2325.52 -145.86,2325.52 -88,2383.38 -88,2888 v1(20,2996) 68,2996 110.5,3038.5 J3.17@194.63,3038.5
  Bottom Layer w6.5: P1.H29@-229.98,2322.99 -217.48,2310.49 v4(-204.98,2310.49)
  Bottom Layer w7: v1(20,2996) 68,2996 100.18,3028.18 177.44,3028.18 187,3037.73 211.63,3062.37 422.63,3062.37 429.63,3055.37 487.63,3055.37 560.8,3128.53 894.89,3128.53 914.99,3108.42 U15.27@972.73,3108.42
MBDACDATAAB7: J3.18 P1.H28 U15.26 | length 1930.2
  Top Layer w6.5: v4(-205.74,2286.25) -161.75,2286.25 -70,2378 -70,2874 14,2958 v1(57.55,2958)
  Top Layer w7: J3.18@324.55,3038.5 v1(404.85,3038.5)
  Bottom Layer w6.5: P1.H28@-229.98,2272.99 -217.48,2285.49 -204.98,2285.49 v4(-205.74,2286.25)
  Bottom Layer w7: v1@56,2958 v1(57.55,2958) 127.22,2958 207.72,3038.5 v1(404.85,3038.5) 492.77,3038.5 561.87,3107.6 894.03,3107.6 912.89,3088.74 U15.26@972.73,3088.74
MBDACDATAAB8: J3.16 P1.G27 U15.29 | length 2141
  Top Layer w7: v4@-305.78,2235.49 -300.05,2241.22 -296.55,2241.22 -278,2259.77 -278,2272 -218,2332 -218,2409.03 -243,2434.03 -243,2455 -218,2480 -218,2570.03 -229,2581.03 -229,2619 -119,2729 -119,2910 -5,3024 v1(56,3024) ; J3.16@324.55,3077.87 v1@452.87,3077.87 ; v1@452.87,3077.87 453.33,3077.87 453.83,3078.37 v1(454.63,3078.37) 453.63,3078.63 v1@452.87,3077.87
  Bottom Layer w6.5: v4(-304.98,2235.49) -292.48,2235.49 P1.G27@-279.98,2222.99
  Bottom Layer w7: v1@51.78,3028.23 70.55,3047 167,3047 198.37,3078.37 v1(454.63,3078.37) 453.63,3078.63 488.9,3078.63 558.06,3147.79 U15.29@972.73,3147.79
MBDACDATAAB9: J3.14 P1.H26 U15.32 | length 2294.1
  Top Layer w6.5: v4(-204.98,2160.49) -265.49,2160.49 -331,2226 -331,2319 -312,2338 -312,2688 -230,2770 -230,2874 -41,3063 v1(20,3063)
  Top Layer w7: J3.14@324.55,3117.23 v1(404.85,3117.23)
  Bottom Layer w6.5: P1.H26@-229.98,2172.99 -217.48,2160.49 v4(-204.98,2160.49)
  Bottom Layer w7: v1(20,3063) 65,3063 106,3104 149,3104 162.23,3117.23 v1(404.85,3117.23) 485.5,3117.23 575.11,3206.85 U15.32@972.73,3206.85
MBDACDATAAB10: J3.12 P1.G25 U15.35 | length 2566.4
  Top Layer w6.5: v4(-304.21,2109.72) -420.23,2225.74 -420.23,2282.62 -431,2293.4 -431,2312.32 -354.5,2388.82 -354.5,2455.18 -377.5,2478.18 -377.5,2555.82 -355.5,2577.82 -355.5,2954.5 -194,3116 v1(20,3116)
  Top Layer w7: J3.12@324.55,3156.6 454.03,3156.6 v1(453.63,3156)
  Bottom Layer w6.5: v4(-304.21,2109.72) -304.98,2110.49 -292.48,2110.49 P1.G25@-279.98,2122.99
  Bottom Layer w7: v1(20,3116) 34,3130 138.23,3130 151.6,3143.37 359.75,3143.37 372.38,3156 v1(453.63,3156) 454.03,3156.6 454.8,3157.37 484.63,3157.37 593.17,3265.9 U15.35@972.73,3265.9
MBDACDATAAB11: J3.10 P1.H23 U15.37 | length 3177.8
  Top Layer w6.5: v4(-254.21,2009.72) -353.72,2009.72 -389,2045 -389,2151.84 -445.23,2208.06 -445.23,2272.27 -490,2317.04 -490,2373 -443,2420 -443,2951 -552,3060 -552,3207 -505,3254 -115,3254 -17.5,3156.5 55.05,3156.5 v1(57.55,3154)
  Top Layer w7: J3.10@324.55,3195.97 v1(404.85,3195.97)
  Bottom Layer w6.5: v4(-254.21,2009.72) -254.98,2010.49 -242.48,2010.49 P1.H23@-229.98,2022.99
  Bottom Layer w7: v1(57.55,3154) 66.58,3154 92.58,3180 168,3180 183.97,3195.97 v1(404.85,3195.97) 405.25,3196.37 405.85,3196.37 406.45,3197.37 480.63,3197.37 588.54,3305.27 U15.37@972.73,3305.27
MBDACDATAAB12: J3.8 P1.G22 U15.40 | length 3283.9
  Top Layer w7: v4(-304.21,1959.72) -339.72,1959.72 -414.25,2034.25 -414.25,2141.38 -470.48,2197.6 -470.48,2261.81 -515.25,2306.58 -515.25,2385.78 -469.24,2431.79 -469.24,2940 -577.25,3048.01 -577.25,3217.46 -515.46,3279.25 -104.54,3279.25 -27.29,3202 33,3202 51,3220 v1(65,3220) ; J3.8@324.55,3235.33 452.67,3235.33 v1(453.63,3234.37)
  Bottom Layer w6.5: v4(-304.21,1959.72) -304.98,1960.49 -292.48,1960.49 P1.G22@-279.98,1972.99
  Bottom Layer w7: v1@57.55,3219 66,3219 79,3206 145,3206 173.37,3234.37 v1(453.63,3234.37) 476.63,3234.37 575.63,3333.37 841.91,3333.37 872.87,3364.33 U15.40@972.73,3364.33
MBDACDATAAB13: J3.6 P1.D24 U15.43 | length 3082.9
  Top Layer w7: v4(-454.21,2059.72) -514.72,2059.72 -605,2150 -605,3225.77 -526.02,3304.75 -93.98,3304.75 -37.23,3248 v1(20,3248) ; J3.6@324.55,3274.7 v1(404.85,3274.7)
  Bottom Layer w6.5: v4(-454.21,2059.72) -454.98,2060.49 -442.48,2060.49 P1.D24@-429.98,2072.99
  Bottom Layer w7: v1@20,3246 76,3246 89,3259 143,3259 158.7,3274.7 v1(404.85,3274.7) 472.97,3274.7 557.63,3359.37 831.14,3359.37 895.15,3423.38 U15.43@972.73,3423.38
MBDACDATAAB14: J3.4 P1.C23 U15.46 | length 3198.8
  Top Layer w7: v4(-504.21,2009.72) -533.72,2009.72 -630.5,2106.5 -630.5,3236.33 -536.58,3330.25 -83.42,3330.25 -60.17,3307 v1(20,3307) ; J3.4@324.55,3314.07 453.33,3314.07 453.63,3314.37 v1(454.63,3314.37)
  Bottom Layer w6.5: v4(-504.21,2009.72) -504.98,2010.49 -492.48,2010.49 P1.C23@-479.98,2022.99
  Bottom Layer w7: v1(20,3307) 75,3307 95,3287 134.23,3287 160.23,3313 424.65,3313 426.15,3314.5 454.5,3314.5 v1(454.63,3314.37) 532.63,3392.37 827.37,3392.37 917.44,3482.44 U15.46@972.73,3482.44
MBDACDATAAB15: J3.3 P1.C22 U15.47 | length 3184.9
  Top Layer w6.5: v4(-504.98,1985.49) -527.52,1985.49 -643.25,2101.22 -643.25,3241.61 -541.86,3343 55,3343 83.93,3314.07 v1(114.33,3314.07)
  Top Layer w7: v1(114.33,3314.07) J3.3@194.63,3314.07
  Bottom Layer w6.5: v4(-504.98,1985.49) -492.48,1985.49 P1.C22@-479.98,1972.99
  Bottom Layer w7: v1(114.33,3314.07) 126.27,3326 419.27,3326 508.63,3415.37 831.98,3415.37 918.74,3502.12 U15.47@972.73,3502.12
MBDACDATACD0: J1.62 P1.D12 U16.29 | length 2963.8
  Top Layer w7: v4(-453.63,1460.31) -454.79,1460.31 -454.98,1460.49 -454.98,1469.36 -482.62,1497 -536.77,1497 -630,1403.77 -630,909.85 -448.15,728 23,728 v1@24,727 ; J1.62@324.55,727.37 452.87,727.37 v1(453.63,728.13)
  Bottom Layer w6.5: v4(-453.63,1460.31) -454.79,1460.31 -454.98,1460.49 -442.48,1460.49 P1.D12@-429.98,1472.99
  Bottom Layer w7: v1@19,721 27,713 81,713 91,703 175.63,703 200.77,728.13 v1(453.63,728.13) 606.48,728.13 731,603.61 731,380.35 949.1,162.25 U16.29@979.74,162.25
  other v1: 20,722.5
MBDACDATACD1: J1.60 P1.C10 U16.32 | length 2706.2
  Top Layer w7: v4(-504.98,1385.49) -574.51,1385.49 -591,1369 -591,926 -449,784 12,784 20,792 v1(20,788) ; J1.60@324.55,766.73 v1(404.85,766.73)
  Bottom Layer w6.5: v4(-504.98,1385.49) -492.48,1385.49 P1.C10@-479.98,1372.99
  Bottom Layer w7: v1(20,788) 20,792 19,793 19,762 54,727 78,727 103,752 162.77,752 177.5,766.73 v1(404.85,766.73) 604.65,766.73 757,614.38 757,394.66 930.36,221.3 U16.32@979.74,221.3
MBDACDATACD2: J1.58 P1.H14 U16.35 | length 2834.6
  Top Layer w6.5: -391,881 -431,921 -431,1001.97 -483.23,1054.19 -483.23,1056.53 -485.75,1059.05 -485.75,1118.72 -549.75,1182.72 -549.75,1271.98 -533.23,1288.51 -533.23,1319.81 -431,1422.03 -431,1467.42 -337.93,1560.49 v4(-254.98,1560.49)
  Top Layer w7: -391,881 -340,881 -269,810 45,810 v1@60,795 ; J1.58@324.55,806.1 452.87,806.1 v1(453.63,806.87)
  Bottom Layer w6.5: v4(-254.98,1560.49) -242.48,1560.49 P1.H14@-229.98,1572.99
  Bottom Layer w7: v1@60,795 73,782 156,782 180.87,806.87 v1(453.63,806.87) 601.29,806.87 783,625.15 783,422.04 904.63,300.41 920.98,300.41 941.03,280.36 U16.35@979.74,280.36
  other v1: 66,795
MBDACDATACD3: J1.56 P1.G13 U16.37 | length 2591.9
  Top Layer w7: v4(-304.98,1510.49) -351.51,1510.49 -394,1468 -394,1377.38 -445.86,1325.52 -473.87,1325.52 -491,1308.38 -491,1264.65 -427,1200.65 -427,1104.62 -328,1005.62 -328,914 -269,855 v1@25,855 ; J1.56@324.55,845.47 v1(404.85,845.47)
  Bottom Layer w6.5: v4(-304.98,1510.49) -292.48,1510.49 P1.G13@-279.98,1522.99
  Bottom Layer w7: v1@22.5,852.5 55.13,819.87 89.87,819.87 101,831 152,831 166.47,845.47 v1(404.85,845.47) 406.45,846.87 598.06,846.87 809,635.92 809,432.81 915.4,326.41 934.35,326.41 941.03,319.73 U16.37@979.74,319.73
  other v1: 20,855
MBDACDATACD4: J1.54 P1.H7 U16.40 | length 2120.4
  Top Layer w7: v4(-254.98,1235.49) -270.51,1235.49 -286,1220 -286,1095 -266,1075 -266,1027 -285,1008 -285,939 -263,917 v1@26,917 ; J1.54@324.55,884.83 452.67,884.83 v1(453.63,883.87)
  Bottom Layer w6.5: v4(-254.98,1235.49) -242.48,1235.49 P1.H7@-229.98,1222.99
  Bottom Layer w7: v1@26,914 20,908 20,901.23 39.23,882 80,882 102,860 137,860 160.87,883.87 v1(453.63,883.87) 597.83,883.87 835,646.69 835,484.82 941.03,378.78 U16.40@979.74,378.78
  other v1: 20,917
MBDACDATACD5: J1.50 P1.G9 U16.43 | length 2030.4
  Top Layer w7: v4(-254.98,1335.49) -194,1274.51 -194,1087 -97,990 40,990 63,967 v1(66,967) ; J1.50@324.43,963.17 394.17,963.17 409,978 453,978 466,965 v1(497,965)
  Bottom Layer w6.5: P1.G9@-279.98,1322.99 -267.48,1335.49 v4(-254.98,1335.49)
  Bottom Layer w7: v1@72.75,970.75 103.5,940 127,940 154.93,967.93 494.07,967.93 v1(497,965) 553.46,965 861,657.46 861,517.87 941.03,437.84 U16.43@979.74,437.84
MBDACDATACD6: J1.48 P1.H10 U16.46 | length 1843.2
  Top Layer w7: v4(-204.98,1385.49) -179.49,1385.49 -127,1333 -127,1175 v1(20,1028) ; J1.48@324.55,1002.93 v1(404.85,1002.93)
  Bottom Layer w6.5: P1.H10@-229.98,1372.99 -217.48,1385.49 v4(-204.98,1385.49)
  Bottom Layer w7: v1@22,1030 58,994 95.87,994 104.8,1002.93 v1(404.85,1002.93) 552.3,1002.93 887,668.23 887,529.62 894.62,522 898,522 923.11,496.89 U16.46@979.74,496.89
MBDACDATACD7: J1.47 P1.H11 U16.47 | length 1893
  Top Layer w7: v4(-204.98,1410.49) -180.49,1410.49 -113,1343 -113,1207 v1(66,1028) ; v1@65,1028 90.07,1002.93 J1.47@194.63,1002.93
  Bottom Layer w6.5: P1.H11@-229.98,1422.99 -217.48,1410.49 v4(-204.98,1410.49)
  Bottom Layer w7: v1@65,1028 77.07,1015.93 244.97,1015.93 255.63,1026.6 547.02,1026.6 900,673.62 900,540 923.42,516.58 U16.47@979.74,516.58
MBDACDATACD8: J1.49 P1.G10 U16.44 | length 1940.5
  Top Layer w7: v4(-254.98,1360.49) -238.49,1360.49 -181,1303 -181,1094 -90,1003 48,1003 52,999 71,999 102.07,967.93 v1(114.33,967.93) ; v1@112.15,965.75 114.33,963.57 J1.49@194.63,963.57
  Bottom Layer w6.5: P1.G10@-279.98,1372.99 -267.48,1360.49 v4(-254.98,1360.49)
  Bottom Layer w7: v1@116.52,965.75 131.7,980.93 436.57,980.93 442.63,987 549.85,987 874,662.85 874,524.23 889.23,509 889.56,509 941.03,457.52 U16.44@979.74,457.52
MBDACDATACD9: J1.53 P1.H8 U16.41 | length 2099.7
  Top Layer w7: v4(-254.98,1260.49) -272.51,1260.49 -299,1234 -299,1085 -279,1065 -279,1035 -298,1016 -298,929 -260,891 60,891 66.17,884.83 v1(114.33,884.83) J1.53@194.63,884.83
  Bottom Layer w6.5: v4(-254.98,1260.49) -242.48,1260.49 P1.H8@-229.98,1272.99
  Bottom Layer w7: v1(114.33,884.83) 115.3,883.87 142.48,883.87 156.62,898 419,898 430.87,909.87 590.21,909.87 848,652.08 848,491.5 941.03,398.47 U16.41@979.74,398.47
MBDACDATACD10: J1.55 P1.G12 U16.38 | length 2592.9
  Top Layer w7: v4(-304.98,1485.49) -357.93,1485.49 -381,1462.42 -381,1371.99 -440.48,1312.52 -466.48,1312.52 -478,1301 -478,1270.04 -414,1206.04 -414,1110 -315,1011 -315,922 -271,878 39,878 v1@70,847 ; v1(66,855) 75.53,845.47 J1.55@194.63,845.47
  Bottom Layer w6.5: v4(-304.98,1485.49) -292.48,1485.49 P1.G12@-279.98,1472.99
  Bottom Layer w7: v1(66,855) 76.3,844.7 147.32,844.7 161.08,858.47 238.23,858.47 247.23,867.47 426.03,867.47 432.63,860.87 602.44,860.87 822,641.31 822,438.2 920.79,339.41 U16.38@979.74,339.41
MBDACDATACD11: J1.57 P1.H13 U16.36 | length 2733.6
  Top Layer w7: v4(-254.98,1535.49) -344.9,1535.49 -417,1463.38 -417,1418 -520.48,1314.52 -520.48,1283.23 -537,1266.7 -537,1188 -473,1124 -473,1064.33 -412,1003.33 -412,926 -384,898 -330.38,898 -255.38,823 86.73,823 103.63,806.1 v1(114.33,806.1) J1.57@194.63,806.1
  Bottom Layer w6.5: v4(-254.98,1535.49) -242.48,1535.49 P1.H13@-229.98,1522.99
  Bottom Layer w7: v1(114.33,806.1) 114.57,805.87 161.48,805.87 175.48,819.87 423.63,819.87 436.63,832.87 593.67,832.87 796,630.54 796,427.43 910.02,313.41 927.66,313.41 941.03,300.04 U16.36@979.74,300.04
MBDACDATACD12: J1.59 P1.C11 U16.33 | length 2758.2
  Top Layer w7: v4(-504.98,1410.49) -586.51,1410.49 -604,1393 -604,920.62 -446.38,763 65,763 71,757 121,757 130.33,766.33 J1.59@194.52,766.33
  Bottom Layer w6.5: v4(-504.98,1410.49) -492.48,1410.49 P1.C11@-479.98,1422.99
  Bottom Layer w7: v1@71,757 79.97,765.97 158.35,765.97 183.25,790.87 422.63,790.87 429.63,783.87 605.9,783.87 770,619.77 770,400.04 929.05,240.99 U16.33@979.74,240.99
  other v1: 66,757
MBDACDATACD13: J1.61 P1.D11 U16.30 | length 2864.6
  Top Layer w7: v4@-454.98,1435.49 v4(-454.21,1436.25) -456.9,1436.25 -504.65,1484 -531.38,1484 -617,1398.38 -617,915.23 -448.77,747 33,747 52.63,727.37 v1(114.33,727.37) J1.61@194.63,727.37
  Bottom Layer w6.5: v4(-454.21,1436.25) -454.98,1435.49 -442.48,1435.49 P1.D11@-429.98,1422.99
  Bottom Layer w7: v1(114.33,727.37) 166.13,727.37 179.9,741.13 420.9,741.13 431.63,751.87 601.13,751.87 744,609 744,387.03 949.1,181.93 U16.30@979.74,181.93
MBDACDATACD14: J1.63 P1.D14 U16.27 | length 3050.2
  Top Layer w7: v4@-456.49,1585.49 -464,1577.98 -464,1557 -511,1510 -542.15,1510 -643,1409.15 -643,904.46 -433.54,695 40,695 47.77,687.23 65.55,687.23 66.32,688 J1.63@194.63,688
  Bottom Layer w6.5: v4(-454.98,1585.49) -442.48,1585.49 P1.D14@-429.98,1572.99
  Bottom Layer w7: v1@65.55,687.23 66.32,688 232.77,688 256.63,711.87 422.63,711.87 429.63,704.87 611.36,704.87 718,598.23 718,347 942.12,122.88 U16.27@979.74,122.88
  other v1: 66,687.23